# EAGLE board measurementBoard (EAGLE 7.3.0)
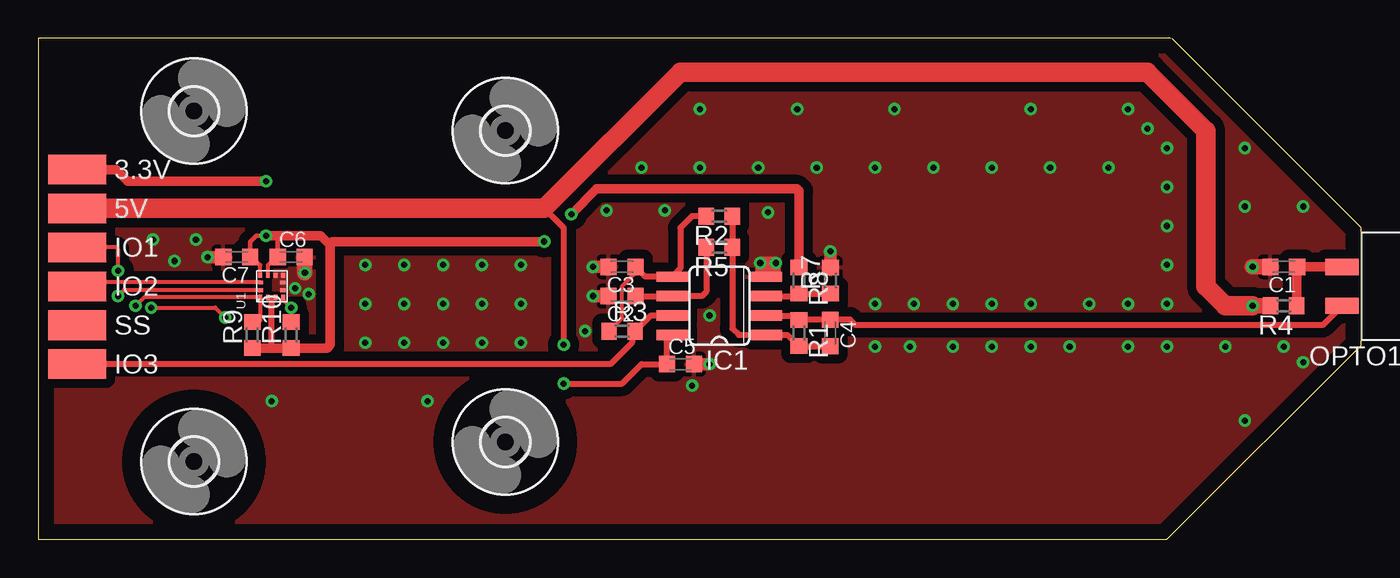
[diagram p0: board, top side]
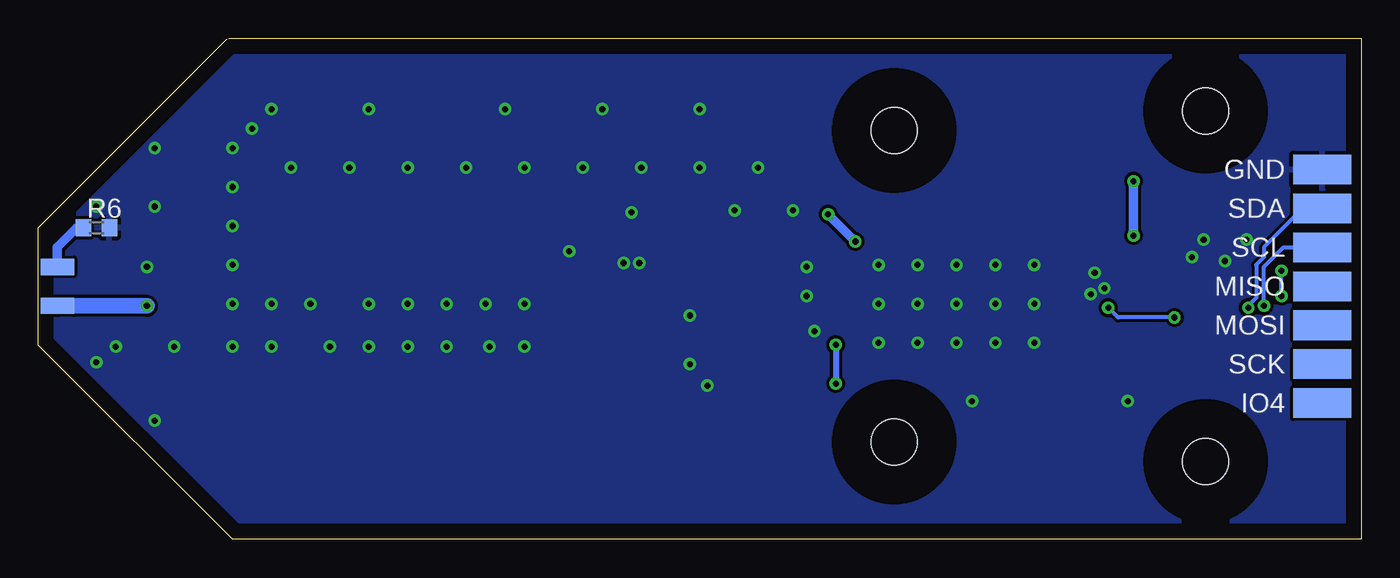
[diagram p1: board, bottom side, seen from below]

Size 86.34 x 32.69 mm. Coordinates in mm from the lower left corner, seen from the top.
Outline: 0,0 73.66,0 86.34,12.68 86.34,20.34 74.04,32.64 73.89,32.69 0,32.69 0,0
Copper layers (1*16): Top 0.035mm / dielectric 1.5mm / Bottom 0.035mm
Design rules "default": minimum track width 10mil, minimum drill 24mil, track to track 8mil, track to pad 8mil, pad to pad 8mil, via to via 8mil, smd to smd 8mil, copper to edge 40mil, drill to drill 8mil, minimum pad ring 10mil, minimum via ring 8mil, stop-mask expansion 4mil, vias tented up to drill 0mil, thermal gap 10mil

## Footprints (pad centres in the part's own frame; a part is rotated, then mirrored left to right if it is on the bottom)
C0603K = smd 1.05 x 1.08: 1 -0.875,0; 2 0.875,0
MICROHAL_CONNECTOR_M_1_REDUCED_EDGE = smd 1.93 x 3.81 bottom: 1 -7.62,0; 3 -5.08,0; 5 -2.54,0; 7 0,0; 9 2.54,0; 11 5.08,0; 13 7.62,0 | smd 1.93 x 3.81: 2 -7.62,0; 4 -5.08,0; 6 -2.54,0; 8 0,0; 10 2.54,0; 12 5.08,0
3,0 = hole 3: 0,0
SO08 = smd 0.66 x 2.032: 1 -1.905,-3.073; 2 -0.635,-3.073; 3 0.635,-3.073; 4 1.905,-3.073; 5 1.905,3.073; 6 0.635,3.073; 7 -0.635,3.073; 8 -1.905,3.073
CNY70_EDGE = smd 1.067 x 2.184 bottom: A 1.27,-1.27; K -1.27,-1.27 | smd 1.067 x 2.184: C -1.27,-1.27; E 1.27,-1.27
R0603 = smd 1 x 1.1: 1 -0.85,0; 2 0.85,0
LGA-12 = smd 0.35 x 0.25: 1 -0.725,0.75; 2 -0.725,0.25; 3 -0.725,-0.25; 4 -0.725,-0.75; 7 0.725,-0.75; 8 0.725,-0.25; 9 0.725,0.25; 10 0.725,0.75 | smd 0.25 x 0.35: 5 -0.25,-0.725; 6 0.25,-0.725; 11 0.25,0.725; 12 -0.25,0.725

## Placement (x,y rotation side)
C1  2.2u  [C0603K]  81.28,17.78 180 top
C2  10n  [C0603K]  38.1,15.88 180 top
C3  1n  [C0603K]  38.1,17.78 180 top
C4  1n  [C0603K]  51.69,13.46 270 top
C5  100n  [C0603K]  41.91,11.43 0 top
C6  100n  [C0603K]  16.51,18.41 0 top
C7  100n  [C0603K]  12.95,18.41 180 top
CON1  MICROHAL_CONNECTOR_M_1_REDUCED  [MICROHAL_CONNECTOR_M_1_REDUCED_EDGE]  2.54,16.51 270 top
H1  MOUNT-HOLE3.0  [3,0]  30.48,26.67 0 top
H2  MOUNT-HOLE3.0  [3,0]  10.16,27.94 0 top
H3  MOUNT-HOLE3.0  [3,0]  10.16,5.08 0 top
H4  MOUNT-HOLE3.0  [3,0]  30.48,6.35 0 top
IC1  MAX989ESA  [SO08]  44.45,15.24 90 top
OPTO1  CNY70EDGE  [CNY70_EDGE]  86.36,16.51 270 top
R1  3k  [R0603]  49.66,13.46 270 top
R2  100k  [R0603]  44.45,21.08 180 top
R3  1M  [R0603]  38.1,13.59 0 top
R4  100R  [R0603]  81.28,15.24 180 top
R5  100k  [R0603]  44.45,19.05 180 top
R6  3k  [R0603]  82.55,20.32 0 bottom
R7  DNF  [R0603]  51.69,16.89 90 top
R8  3k  [R0603]  49.66,16.89 270 top
R9  4.7k  [R0603]  13.97,13.34 90 top
R10  4.7k  [R0603]  16.51,13.34 90 top
U1  [LGA-12]  15.24,16.51 90 top

## Library data of the parts
C1-C7 R1-R10 = rcl
CON1 = microhal-connector_v2
H1-H4 = holes
IC1 = maxim; MF: MAXIM; MPN: MAX989ESA+; OC_FARNELL: 1550496; OC_NEWARK: 23K6628
OPTO1 = cny70
U1 = lis2dh12

## Nets
+3V3: C6.1 C7.1 CON1.2 R8.1 R9.1 R10.1 U1.2 U1.3 U1.9 U1.10
+5V: C5.1 CON1.4 IC1.8 OPTO1.A R4.2
GND: C1.2 C2.2 C3.2 C5.2 C6.2 C7.2 CON1.1 IC1.4 R6.2 R7.2 U1.5 U1.6 U1.7 U1.8
INT1: CON1.6 U1.12
INT2: CON1.8 U1.11
N$1: C4.2 IC1.1 R1.2 R2.1 R5.1
N$2: C4.1 IC1.2 OPTO1.E R1.1
N$3: C3.1 IC1.5 R2.2 R3.1
N$5: C1.1 OPTO1.C R4.1
N$6: C2.1 IC1.6 R5.2
N$7: OPTO1.K R6.1
N$8: IC1.3 R7.1 R8.2
OUT: CON1.12 IC1.7 R3.2
SCL: CON1.5 R9.2 U1.1
SDA: CON1.3 R10.2 U1.4

## Tracks (layer width: path | path; a pad name or v marks a point on that pad's centre or on a via)
+3V3  (via drill 0.4)
  Top 0.254: U1.10 14.49,17.89 13.97,18.41 C7.1 | U1.9 14.99,17.91 15.24,18.16 C6.1 | U1.3 U1.2 15.15,15.79 15.24,15.75 15.24,15.37
  Top 0.305: C7.1 13.83,19.42 14.22,19.81 v14.86,19.81 | C6.1 15.63,19.54 15.37,19.81
  Top 0.406: R9.1 15.03,12.48 15.24,12.7 15.24,15.37
  Top 0.61: R9.1 R10.1 18.84,12.48 19.05,12.7 19.05,19.05 | 19.05,19.05 19.05,19.18 18.41,19.81 15.37,19.81 v14.86,19.81 | v14.86,23.37 5.84,23.37 5.08,24.13 CON1.2 | R8.1 49.66,22.73 49.53,22.86 36.45,22.86 v34.8,21.21 | v33.02,19.43 19.18,19.43 19.05,19.05
  Bottom 0.61: v14.86,19.81 v14.86,23.37 | v34.8,21.21 v33.02,19.43
+5V  (via drill 0.4)
  Top 0.406: IC1.8 41.03,12.99 C5.1 39.37,11.43 38.1,10.16 v34.29,10.16 | 33.02,21.59 34.29,20.32 v34.29,12.7
  Top 1.016: R4.2 v79.25,15.24
  Top 1.27: CON1.4 33.02,21.59 41.91,30.48 72.39,30.48 76.2,26.67 76.2,16.51 77.47,15.24 v79.25,15.24
  Bottom 0.406: v34.29,12.7 v34.29,10.16
  Bottom 1.016: v79.25,15.24 OPTO1.A
GND  (via drill 0.4)
  Top 0.61: v48.13,18.03 48.13,17.14 IC1.4 | IC1.4 47.12,17.14 v47.12,18.03 | IC1.4 47.62,17.14 47.62,18.03
  Top 0.813: C5.2 v43.81,11.43 | C3.2 v36.2,17.78 | C2.2 v36.2,15.88 | R7.2 v51.69,18.8 | v47.12,18.03 47.62,18.03 v48.13,18.03 | v11.05,18.41 C7.2
  Top 1.016: C6.2 17.39,17.41 v17.4,17.4 | C1.2 v79.25,17.78
  other vias: 47.62,21.34 43.81,14.61 40.89,21.46 35.69,13.59 42.67,10.03 21.34,17.91 23.88,17.91 21.34,12.83 23.88,12.83 26.42,12.83 28.96,12.83 31.5,12.83 31.5,15.37 31.5,17.91 28.96,17.91 26.42,17.91 21.34,15.37 26.42,15.37 23.88,15.37 28.96,15.37 16.76,16.38 17.65,16 10.29,19.56 8.89,18.16 7.49,19.56 25.4,9.02 15.24,9.02 82.55,11.56 78.74,7.75 82.55,21.72 78.74,25.53 78.74,21.72 73.66,15.37 73.66,17.91 73.66,20.45 73.66,22.99 73.66,25.53 72.39,26.8 71.12,28.07 43.18,28.07 55.88,28.07 64.77,28.07 49.53,28.07 39.37,24.26 43.18,24.26 46.99,24.26 50.8,24.26 54.61,24.26 58.42,24.26 62.23,24.26 66.04,24.26 69.85,24.26 54.61,15.37 57.15,15.37 59.69,15.37 62.23,15.37 64.77,15.37 68.58,15.37 71.12,15.37 54.61,12.57 56.9,12.57 59.69,12.57 62.23,12.57 64.77,12.57 73.66,12.57 71.12,12.57 67.31,12.57 77.47,12.57 81.28,12.57 37.08,21.46
  pour Bottom: 0,33.02 73.66,33.02 86.36,20.32 86.36,12.7 73.66,0 0,0 0,30.48
  pour Top (isolate 0.61): 0,33.02 73.66,33.02 86.36,20.32 86.36,12.7 73.66,0 0,0 0,27.94
  pour Top (no thermals): 15.37,17.65 15.37,16 17.53,16 17.53,17.65
INT1  (via drill 0.4)
  Top 0.254: U1.12 5.59,16.26 v5.21,15.88 | v5.21,17.53 5.21,18.92 5.08,19.05 CON1.6
  Bottom 0.254: v5.21,15.88 v5.21,17.53
INT2
  Top 0.254: U1.11 2.54,16.76 CON1.8
N$1
  Top 0.406: C4.2 51.66,12.61 R1.2 49.57,12.7 49.53,12.7 48.9,13.34 IC1.1 45.72,13.34 45.3,13.76 R5.1 R2.1
N$2
  Top 0.406: OPTO1.E 83.82,13.97 53.34,13.97 52.97,14.34 C4.1 49.68,14.34 R1.1 49.36,14.61 IC1.2
N$3
  Top 0.254: R3.1 38.1,14.44 38.1,16.51 38.98,17.39 C3.1
  Top 0.406: C3.1 39.61,17.14 IC1.5 41.91,17.68 41.91,20.32 42.67,21.08 R2.2
N$5
  Top 0.61: OPTO1.C C1.1 82.13,17.75 R4.1
N$6
  Top 0.406: C2.1 IC1.6 43.31,15.88 43.6,16.17 R5.2
N$7
  Bottom 0.61: R6.1 83.82,20.32 85.09,19.05 OPTO1.K
N$8
  Top 0.406: IC1.3 49.49,15.88 R8.2 R7.1
OUT
  Top 0.406: IC1.7 39.97,14.61 R3.2 38.73,13.37 38.73,12.83 37.34,11.43 CON1.12
SCL  (via drill 0.4)
  Top 0.254: R9.2 14.49,14.28 U1.1 6.89,15.79 v6.35,15.24
  Bottom 0.254: v6.35,15.24 6.35,17.78 5.08,19.05 CON1.5
SDA  (via drill 0.4)
  Top 0.254: v7.37,15.11 11.56,15.11 v12.19,14.48 | 16.64,14.31 R10.2 v16.51,15.11 15.99,15.63 U1.4
  Bottom 0.254: CON1.3 3.81,21.59 6.35,19.05 6.35,18.41 6.86,17.91 6.86,15.75 7.37,15.24 v7.37,15.11 | v12.19,14.48 15.88,14.48 v16.51,15.11